# Altium PCB PCB3__Right Leg.PcbDoc
Units mm, origin at the board's own origin, x right, y up, seen from the top; angles counter-clockwise.
Board outline 30 x 20 mm, 2 copper layers (Top Layer, Bottom Layer); 24 components, 16 nets, 92 pads, 15 vias.
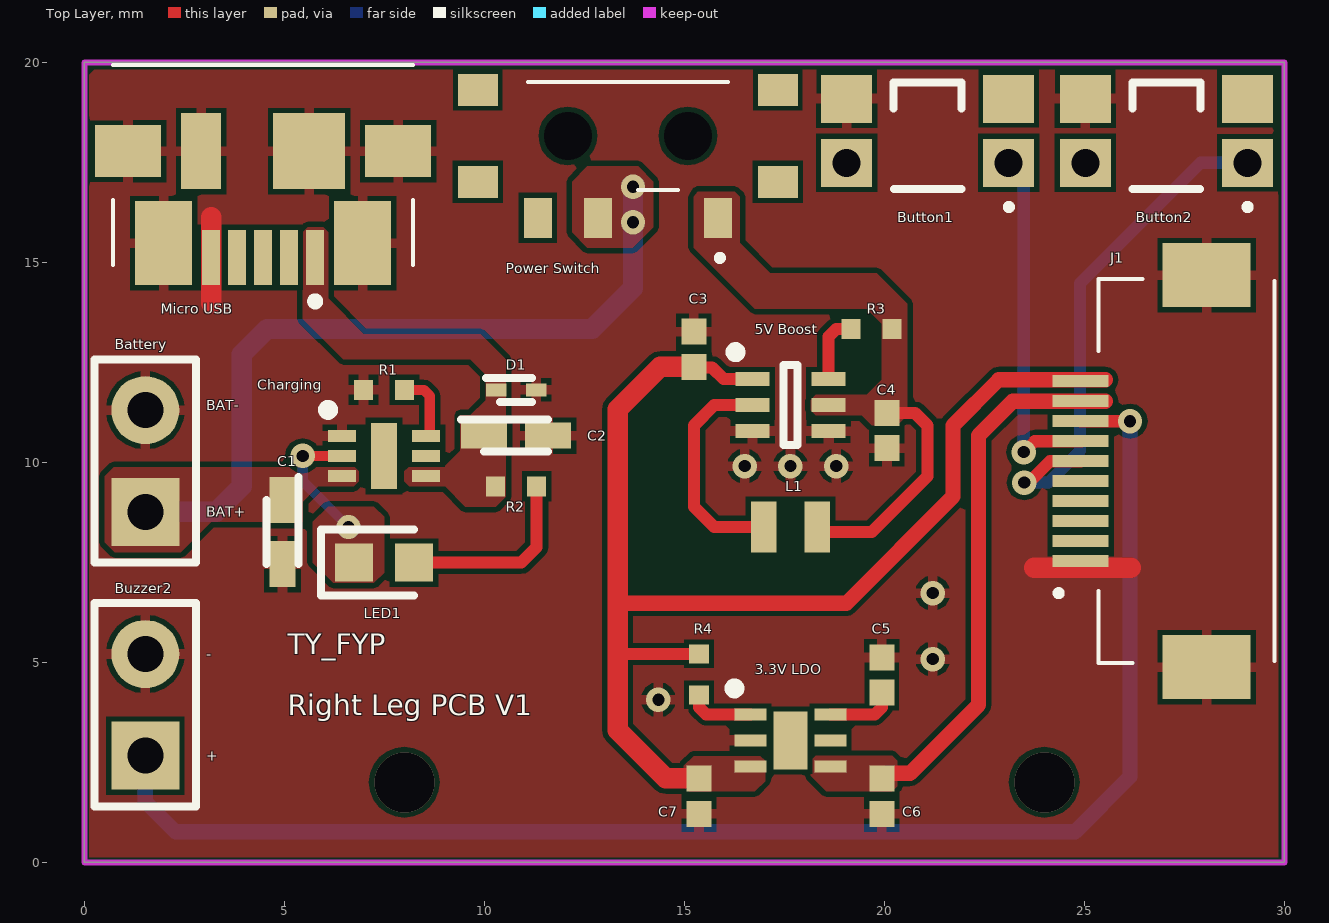
[diagram p0: Top Layer view]
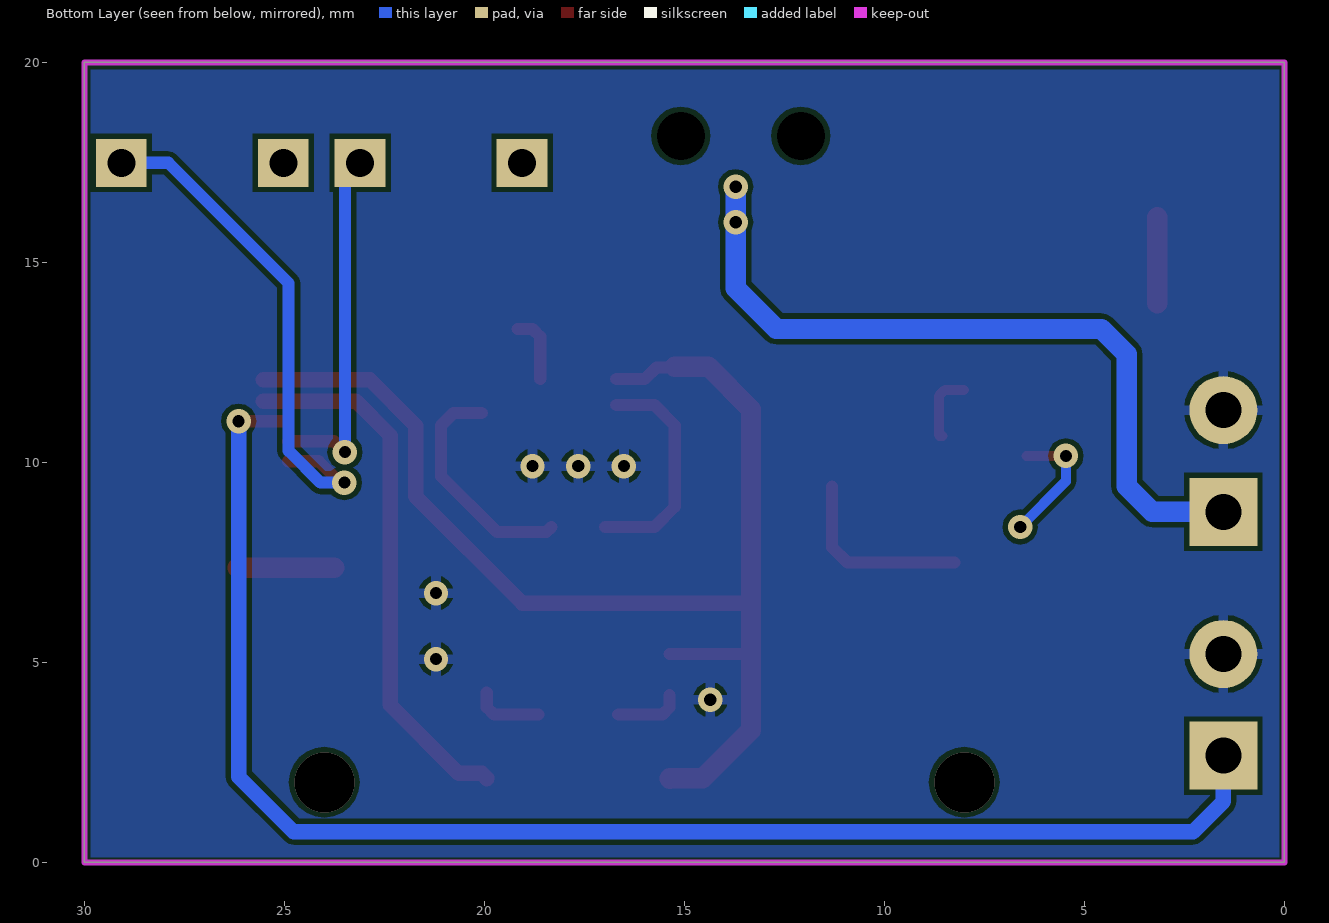
[diagram p1: Bottom Layer view, seen from below]
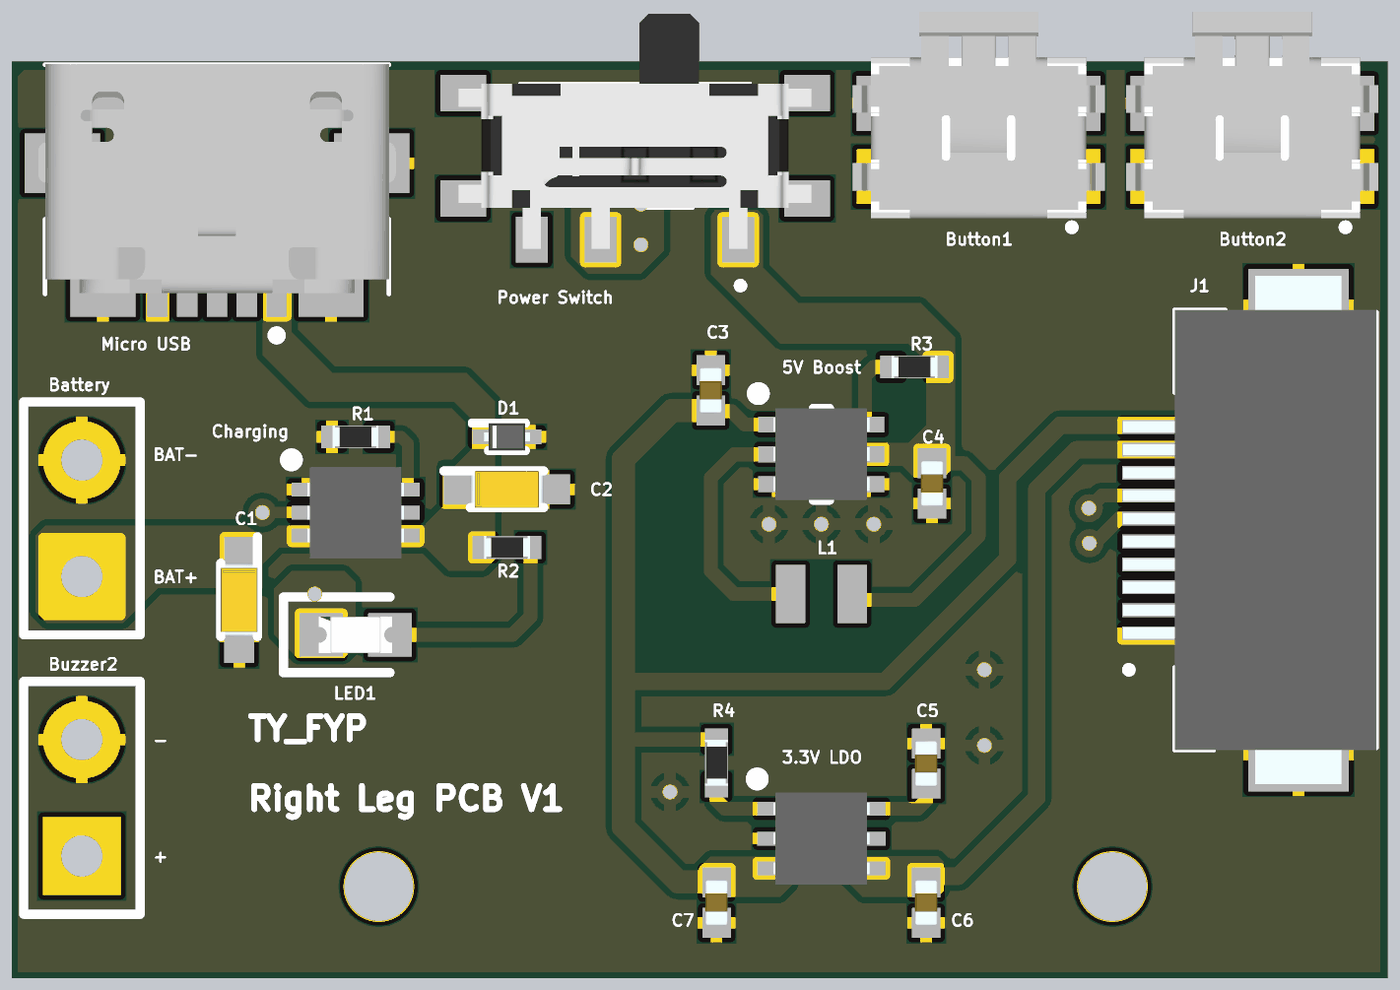
[diagram p2: 3D render of the assembled board from above, using the file's embedded part models]

## Layer stack, top to bottom
Top Solder: solder mask 0.0102, Solder Resist, Dk 3.5
Top Layer: signal copper 0.0356
Dielectric 1: dielectric 0.32, FR-4, Dk 4.8
Bottom Layer: signal copper 0.0356
Bottom Solder: solder mask 0.0102, Solder Resist, Dk 3.5

## Board outline
0,0 0,20 30,20 30,0

## Design rules (kind name [scope] priority, off if disabled: settings)
Clearance [All] p1: gap=0.127 ignorepadtopadclearanceinfootprint=FALSE except(0: Arc-Hole Track-Hole SMDPad-Hole THPad-Hole Via-Hole Fill-Hole Poly-Hole Region-Hole Text-Hole)
PolygonConnect PolygonConnect_1 [InNet('BAT-')] p1: connectstyle=Relief reliefconductorwidth=0.254 reliefentries=4 polygonreliefangle="90 Angle" airgapwidth=0.127
PolygonConnect [All] p2: connectstyle=Direct reliefconductorwidth=0.203 reliefentries=4 polygonreliefangle="90 Angle" airgapwidth=0.127
RoutingVias [All] p1: holewidth=0.305 width=0.61 viastyle="Through Hole" minholewidth=0.305 minwidth=0.61 maxholewidth=0.711 maxwidth=1.27
SolderMaskExpansion [All] p1: expansion=0.102
Width [All] p1: maxlimit=1.524 minlimit=0.127 preferedwidth=0.254
30 further rules are at their usual default settings.

## Components (designator, comment, footprint, x,y, rotation, side; value= is the part's Value field where it differs from the comment)
"3.3V LDO" "3.3V LDO 150mA" SON65P200X200X90-7N-D 17.653,3.048 r0 top (schematic designator IC3)
"5V Boost" "5V Boost 500mA" SON65P200X200X80-6N 17.653,11.43 r0 top (schematic designator IC2)
Battery "Battery" "Buzzer & Battery" 1.524,10.033 r90 top (schematic designator JP1)
Button1 "Push Button" Push_Button 21.082,18.288 r180 top (schematic designator S1)
Button2 "Push Button" Push_Button 27.051,18.288 r180 top (schematic designator S2)
Buzzer2 "Buzzer" "Buzzer & Battery" 1.524,3.937 r90 top (schematic designator LS1)
C1 "0603_Tan_4.7u" CAPPM168X90N 4.953,8.255 r270 top
C2 "0603_Tan_4.7u" CAPPM168X90N 10.795,10.668 r0 top
C3 "0402_10u" CAPC1005X55N 15.24,12.827 r90 top
C4 "0402_10u" CAPC1005X55N 20.066,10.795 r270 top
C5 "0402_100n" 0402_CAP 19.939,4.684 r90 top
C6 "0402_1u" CAPC1005X55N 19.939,1.651 r270 top
C7 "0402_1u" CAPC1005X55N 15.367,1.651 r270 top
Charging "Battery Charging IC" SON50P200X200X80-7N-D 7.493,10.16 r0 top (schematic designator IC1)
D1 "TVS 5V" SODFL1006X40N 10.795,11.811 r0 top
J1 "FFC Connector" 528921033 27.559,9.779 r90 top
L1 "0603_L 2.2u" Inductor 17.653,8.382 r180 top
LED1 "0603_Red_LED" LEDC1608X80N 7.493,7.493 r0 top
"Micro USB" "MicroUSB" 473461001 4.471,17.024 r180 top (schematic designator J2)
"Power Switch" "Slide Switch" 450404015514 13.589,18.161 r0 top (schematic designator S3)
R1 "0402_1.5k" 0402_R 7.493,11.811 r180 top
R2 "0402_1k" 0402_R 10.795,9.398 r180 top
R3 "0402_10M" 0402_R 19.685,13.335 r0 top
R4 "0402_10M" 0402_R 15.367,4.699 r90 top

## Footprints (in the part's own frame and the unit in brackets; to place one, negate y for a bottom-side part, rotate by r counter-clockwise, add the part's x,y. Pads: shape width x height; smd on the part's side, far side on the other; paste and mask are expansions set on the pad)
0402_CAP [mm]
  rect 0.65x0.62 smd: 1(-0.44,0) 2(0.44,0)
  body extent -0.5,-0.25 0.5,0.25, height 0.55
0402_R [mm]
  rect 0.475x0.5 smd: 1(-0.513,0) 2(0.513,0)
  body extent -0.5,-0.25 0.5,0.25, height 0.35
473461001 [mm]
  rect 0.45x1.38 smd: 1(-1.3,1.903) 2(-0.65,1.903) 3(0,1.903) 4(0.65,1.903) 5(1.3,1.903)
  rect 1.425x2.1 smd: 6(2.487,1.544) 7(-2.487,1.544)
  rect 1.8x1.9 smd: 8(-1.15,-0.756)
  rect 1x1.9 smd: 9(1.55,-0.756)
  rect 1.65x1.3 smd: 10(-3.375,-0.756) 11(3.375,-0.756)
  silkscreen extent -3.75,-2.91 3.75,3.1, body extent -3.9,-2.92 3.9,2.08, height 2.66
528921033 [mm]
  rect 0.3x1.4 smd: 1(-2.25,2.65) 2(-1.75,2.65) 3(-1.25,2.65) 4(-0.75,2.65) 5(-0.25,2.65) 6(0.25,2.65) 7(0.75,2.65) 8(1.25,2.65) 9(1.75,2.65) 10(2.25,2.65)
  rect 1.6x2.2 smd: MP1(-4.9,-0.5) MP2(4.9,-0.5)
  silkscreen extent -4.8,-2.2 4.8,3.25, body extent -5.54,-2.2 5.54,3.32, height 2.1
450404015514 [mm]
  rect 0.7x1 smd: 1(2.25,-2.05) 2(-0.75,-2.05) 3(-2.25,-2.05)
  round 0.6 hole 1.2 unplated: MH1(1.5,0) MH2(-1.5,0)
  rect 1x0.8 smd: MP1(3.75,-1.15) MP2(-3.75,-1.15) MP3(-3.75,1.15) MP4(3.75,1.15)
  silkscreen extent -2.5,-3.1 2.5,1.35, body extent -3.85,-2.25 3.85,2.88, height 1.4
"Buzzer & Battery" [mm]
  rect 1.7x1.7 hole 0.9: 1(-1.27,0)
  round 1.7 hole 0.9: 2(1.27,0)
  silkscreen extent -2.54,-1.27 2.54,1.27
CAPC1005X55N [mm]
  rect 0.65x0.62 smd: 1(-0.44,0) 2(0.44,0)
  body extent -0.5,-0.25 0.5,0.25, height 0.55
CAPPM168X90N [mm]
  rect 1.15x0.65 smd: 1(-0.8,0) 2(0.8,0)
  silkscreen extent -1.38,-0.4 0.8,0.4, body extent -0.8,-0.4 0.8,0.4, height 0.9
Inductor [mm]
  rect 0.64x1.27 smd: 1(-0.67,0) 2(0.67,0)
LEDC1608X80N [mm]
  rect 0.95x0.95 smd: 1(-0.75,0) 2(0.75,0)
  silkscreen extent -1.58,-0.82 0.75,0.82, body extent -0.8,-0.4 0.8,0.4, height 0.7
Push_Button [mm]
  rect 1.27x1.2 hole 0.7: 1(-2.025,0.8) 4(2.025,0.8)
  rect 1.27x1.2 smd: 2(-2.025,-0.8) 3(2.025,-0.8)
  silkscreen extent -2.08,-1.21 0.85,1.96, body extent -2.75,-2.79 2.75,1.71, height 1.65
SODFL1006X40N [mm]
  rect 0.51x0.32 smd: 1(-0.5,0) 2(0.5,0)
  silkscreen extent -0.75,-0.3 0.4,0.3, body extent -0.5,-0.3 0.5,0.3, height 0.4
SON50P200X200X80-7N-D [mm]
  rect 0.7x0.3 smd: 1(-1.05,0.5) 2(-1.05,0) 3(-1.05,-0.5) 4(1.05,-0.5) 5(1.05,0) 6(1.05,0.5)
  rect 0.65x1.65 smd: 7(0,0)
  silkscreen extent -1.52,1.03 -1.27,1.27, body extent -1.05,-1 1.05,1, height 0.8
SON65P200X200X80-6N [mm]
  rect 0.85x0.35 smd: 1(-0.95,0.65) 2(-0.95,0) 3(-0.95,-0.65) 4(0.95,-0.65) 5(0.95,0) 6(0.95,0.65)
  silkscreen extent -1.5,-1 0.18,1.45, body extent -1.05,-1 1.05,1, height 0.8
SON65P200X200X90-7N-D [mm]
  rect 0.8x0.3 smd: 1(-1,0.65) 2(-1,0) 3(-1,-0.65) 4(1,-0.65) 5(1,0) 6(1,0.65)
  rect 0.85x1.45 smd: 7(0,0)
  silkscreen extent -1.52,1.18 -1.27,1.42, body extent -1.05,-1 1.05,1, height 0.9

## Part data
"3.3V LDO": "Integrated Circuit", Manufacturer_Name=Microchip, Manufacturer_Part_Number=MIC47050-1.8YML-TR, Datasheet Link=https://componentsearchengine.com/Datasheets/1/MIC47050-1.8YML-TR.pdf, Height=0.9mm
"5V Boost": "Integrated Circuit", Manufacturer_Name="Maxim Integrated", Manufacturer_Part_Number=MAX17223ELT+T, Datasheet Link=https://datasheets.maximintegrated.com/en/ds/MAX17220-MAX17225.pdf, Height=0.8mm
Battery: "HDR-1X2"
Button1 Button2: "Switch", Manufacturer_Name=Panasonic, Manufacturer_Part_Number=EVQ-9P701P, Mouser2 Part Number=667-EVQ-9P701P, Datasheet Link=https://componentsearchengine.com//EVQ-9P701P.pdf, Mouser2 Price/Stock=https://www.mouser.com/Search/Refine.aspx?Keyword=667-EVQ-9P701P
Buzzer2: "Loudspeaker or Buzzer", Manufacturer_Name="CUI Inc.", Manufacturer_Part_Number=CPT-12123-81-SMT-TR, Datasheet Link=https://www.cuidevices.com/product/resource/cpt-12123-81-smt-tr.pdf, Height=3.3mm
C1 C2: "Capacitor Polarised", Manufacturer_Name=Vishay, Manufacturer_Part_Number=TMCJ0J475MTRF, Datasheet Link=https://componentsearchengine.com/Datasheets/1/TMCJ0J475MTRF.pdf, Height=0.9mm
C3 C4 C6 C7: library part 0402_C, "Capacitor", Manufacturer_Name=Kemet, Manufacturer_Part_Number=C0402C474K8RACTU, Datasheet Link=https://content.kemet.com/datasheets/KEM_C1002_X7R_SMD.pdf, Height=0.55mm
C5: library part 0603_C, "Capacitor", Manufacturer_Name=Vishay, Manufacturer_Part_Number=VJ0603HIFRQ1KIT, Datasheet Link=http://www.vishay.com/docs/45226/vj31xrohsautomlcc.pdf, Height=0.97mm
Charging: "Integrated Circuit", Manufacturer_Name=Microchip, Manufacturer_Part_Number=MCP73830LT-0AAI/MYY, Mouser2 Part Number=579-MCP73830LT0AAIMY, Datasheet Link=https://componentsearchengine.com//MCP73830LT-0AAI_MYY.pdf, Height=0.8mm, Mouser2 Price/Stock=https://www.mouser.com/Search/Refine.aspx?Keyword=579-MCP73830LT0AAIMY
D1: "TVS Diode (Uni-directional)", Manufacturer_Name="ON Semiconductor", Manufacturer_Part_Number=SZESD9101P2T5G, Mouser2 Part Number=863-SZESD9101P2T5G, Datasheet Link=https://componentsearchengine.com//SZESD9101P2T5G.pdf, Height=0.4mm, Mouser2 Price/Stock=https://www.mouser.com/Search/Refine.aspx?Keyword=863-SZESD9101P2T5G
J1: "Connector", Manufacturer_Name=Molex, Manufacturer_Part_Number=52892-1033, Datasheet Link=https://componentsearchengine.com/Datasheets/2/52892-1033.pdf, Height=2mm
L1: "Inductor", Manufacturer_Name=Pulse, Manufacturer_Part_Number=PE-0603CLH2R2STS, Datasheet Link=https://www.mouser.de/datasheet/2/336/PLEI_S_A0011079421_1-2514267.pdf, Height=1mm
LED1: "LED", Manufacturer_Name="Wurth Elektronik", Manufacturer_Part_Number=150060RS75000, Datasheet Link=http://katalog.we-online.de/led/datasheet/150060RS75000.pdf, Height=0.8mm
"Micro USB": "Connector", Manufacturer_Name=Molex, Manufacturer_Part_Number=47346-1001, Datasheet Link=http://www.molex.com/webdocs/datasheets/pdf/en-us/0473461001_IO_CONNECTORS.pdf, Height=2.94mm
"Power Switch": "Switch", Manufacturer_Name="Wurth Elektronik", Manufacturer_Part_Number=450404015514, Datasheet Link=https://katalog.we-online.de/em/datasheet/450404015514.pdf, Height=1.4mm
R1 R2 R3 R4: library part 0402_R, "Resistor", Manufacturer_Name=Panasonic, Manufacturer_Part_Number=ERA-2ARB472X, Datasheet Link=http://industrial.panasonic.com/cdbs/www-data/pdf/RDM0000/AOA0000C307.pdf, Height=0.4mm

## Via types
v1: diameter 0.61, hole 0.305, Top Layer to Bottom Layer, tented both sides, 13 vias
v2: diameter 1.5, hole 1.5, Top Layer to Bottom Layer, 2 vias

## Nets (pads, with @x,y where several pads share a name; then routed paths per layer and width w, separated by ;. In a path a pad name is that pad's centre, name@x,y a point inside that pad or via, vN(x,y) a via of type N, cw(c..) or ccw(c..) an arc to the next point about the centre after c; other vN are vias at no path point)
3.3V: "3.3V LDO.4" C6.1 J1.9 | length 13.4
  Top Layer w0.381: C6.1 19.939,2.106 20.058,2.225 20.64,2.225 22.352,3.937 22.352,10.668 23.213,11.529 J1.9 J1.9@25.527,11.529
5V: "3.3V LDO.3" "5V Boost.1" C3.1 C7.1 J1.10 R4.2 | length 32.1
  Top Layer w0.305: 13.335,5.207 15.362,5.207 R4.2 ; C3.1 15.24,12.372 15.695,12.372 15.987,12.08 16.703,12.08
  Top Layer w0.381: 13.335,6.477 19.05,6.477 21.717,9.144 21.717,10.922 22.86,12.065 J1.10@25.527,12.065
  Top Layer w0.508: C3.1 14.395,12.387 13.335,11.327 13.335,6.477 13.335,5.207 13.335,3.302 14.534,2.103 15.367,2.103 C7.1
BAT+: "Power Switch.2" Battery.1 C1.1 Charging.3 | length 19
  Bottom Layer w0.508: Battery.1 3.302,8.763 3.937,9.398 3.937,12.7 4.572,13.335 12.7,13.335 13.716,14.351 v1(13.716,16.002) v1(13.716,16.891)
BAT-: "3.3V LDO.2" "5V Boost.3" "5V Boost.4" "Micro USB.5" "Micro USB.6" "Micro USB.7" "Micro USB.8" "Micro USB.9" "Micro USB.10" "Micro USB.11" Battery.2 Button1.3 Button2.3 Buzzer2.2 C1.2 C2.2 C3.2 C4.2 C5.2 C6.2 C7.2 Charging.1 D1.2 J1.1 J1.MP1 J1.MP2 R1.2 | length 4.6
  Top Layer w0.508: 3.175,13.97 3.175,16.129 ; 23.749,7.366 26.162,7.366
  other v1: 14.351,4.064 21.209,5.08 21.209,6.731 16.51,9.906 17.653,9.906 18.796,9.906
Button1: Button1.1 J1.7 | length 8.9
  Top Layer w0.305: v1(23.486,10.254) 23.761,10.529 J1.7
  Bottom Layer w0.305: Button1.1 23.486,17.109 v1(23.486,10.254)
Button2: Button2.1 J1.6 | length 13
  Top Layer w0.305: v1(23.499,9.492) 23.604,9.492 24.141,10.029 J1.6
  Bottom Layer w0.305: v1(23.499,9.492) 24.097,9.492 24.892,10.287 24.892,14.478 27.902,17.488 Button2.1
Buzzer2: Buzzer2.1 J1.8 | length 36.8
  Top Layer w0.305: J1.8 v1(26.142,11.029)
  Bottom Layer w0.381: Buzzer2.1 1.524,1.524 2.286,0.762 24.765,0.762 26.142,2.139 v1(26.142,11.029)
LX: "5V Boost.2" L1.2 | length 5.7
  Top Layer w0.305: 16.703,11.43 15.748,11.43 15.24,10.922 15.24,8.89 15.748,8.382 L1.2
NetC2_1: "Micro USB.1" C2.1 Charging.4 D1.1 R2.2
NetC4_1: "5V Boost.5" "Power Switch.1" C4.1 L1.1 R3.2 | length 5.8
  Top Layer w0.305: L1.1 18.45,8.255 19.685,8.255 21.082,9.652 21.082,10.922 20.769,11.235 C4.1
NetC5_1: "3.3V LDO.6" C5.1 | length 1.7
  Top Layer w0.305: 18.653,3.698 19.76,3.698 19.939,3.877 C5.1
NetIC1_6: Charging.6 R1.1 | length 1.8
  Top Layer w0.254: R1.1 8.487,11.811 8.636,11.662 8.636,10.683 8.613,10.66 Charging.6
NetIC2_6: "5V Boost.6" R3.1 | length 1.7
  Top Layer w0.305: 18.603,12.08 18.603,13.142 18.796,13.335 R3.1
NetIC3_1: "3.3V LDO.1" R4.1 | length 1.7
  Top Layer w0.305: R4.1 15.367,3.877 15.546,3.698 16.653,3.698
NetLED1_2: LED1.2 R2.1 | length 4.7
  Top Layer w0.305: LED1.2 10.922,7.493 11.308,7.879 R2.1
STAT: Charging.2 LED1.1 | length 3.2
  Top Layer w0.254: v1(5.461,10.16) Charging.2
  Bottom Layer w0.254: v1(5.461,10.16) 5.461,9.525 v1(6.604,8.382)
pads on no net: "3.3V LDO.5" "3.3V LDO.7" "Micro USB.2" "Micro USB.3" "Micro USB.4" "Power Switch.3" "Power Switch.MH1" "Power Switch.MH2" "Power Switch.MP1" "Power Switch.MP2" "Power Switch.MP3" "Power Switch.MP4" Button1.2 Button1.4 Button2.2 Button2.4 Charging.5 Charging.7 J1.2 J1.3 J1.4 J1.5
copper on no net:
  other v2: 8,2 24,2

## Polygon pours and split planes (outlines as drawn)
BAT- on Top Layer "Top Layer-BAT-" (solid, remove dead copper, pour order 22): 0.254,19.812 29.845,19.812 29.845,0.127 0.127,0.127 0.127,19.685
no net on Top Layer "Top Layer-No Net" (solid, pour order 20): 0.254,19.812
3.3V on Top Layer "Top Layer-3.3V" (solid, pour order 18): 18.288,2.667 18.161,2.54 18.161,2.159 18.542,1.778 20.193,1.778 20.32,1.905 20.32,2.54 20.193,2.667
5V on Top Layer "Top Layer-5V" (solid, pour order 16): 15.113,1.778 16.764,1.778 17.018,2.032 17.018,2.54 16.891,2.667 15.24,2.667 14.986,2.413 14.986,1.905
BAT- on Top Layer "Top Layer-BAT- 1" (solid, pour order 14): 17.018,2.794 17.145,2.921 17.145,3.175 17.018,3.302 14.732,3.302 14.605,3.175 14.605,2.921 14.732,2.794
BAT- on Top Layer "Top Layer-BAT- 2" (solid, pour order 12): 16.129,11.049 18.923,11.049 19.304,10.668 19.304,9.779 18.796,9.271 16.51,9.271 15.875,9.906 15.875,10.795
NetC4_1 on Top Layer "Top Layer-NetC4_1" (solid, pour order 10): 15.24,16.637 15.335,16.764 16.256,16.764 16.383,16.637 16.383,15.494 17.145,14.732 19.812,14.732 20.574,13.97 20.574,11.176 20.32,10.922 19.685,10.922 19.431,11.176 18.288,11.176 18.161,11.303 18.161,11.557 18.288,11.684 19.558,11.684 19.939,12.065 19.939,13.462 19.558,13.843 16.764,13.843 15.24,15.367
BAT+ on Top Layer "Top Layer-BAT+" (solid, pour order 6): 12.7,15.367 12.573,15.367 13.716,15.367 14.224,15.875 14.224,17.018 13.843,17.399 12.573,17.399 12.192,17.018 12.192,15.748 12.573,15.367 13.208,15.367
STAT on Top Layer "Top Layer-STAT" (solid, pour order 4): 6.223,6.985 7.239,6.985 7.493,7.239 7.493,8.636 7.239,8.89 6.096,8.89 5.715,8.509 5.715,7.493
BAT+ on Top Layer "Top Layer-BAT+ 1" (solid, pour order 2): 6.731,9.398 6.858,9.525 6.858,9.779 6.756,9.881 0.737,9.881 0.508,9.652 0.508,8.001 0.762,7.747 2.413,7.747 3.175,8.509 5.461,8.509 5.461,9.017 5.842,9.398
NetC2_1 on Top Layer "Top Layer-NetC2_1" (solid, pour order 0): 5.588,15.875 5.969,15.875 6.096,15.748 6.096,14.097 6.985,13.208 9.906,13.208 10.541,12.573 10.541,9.144 10.287,8.89 9.525,8.89 9.017,9.398 8.128,9.398 8.001,9.525 8.001,9.779 8.128,9.906 9.017,9.906 9.398,10.287 9.398,11.176 9.652,11.176 10.033,11.557 10.033,12.192 9.652,12.573 6.477,12.573 5.461,13.589 5.461,15.748
BAT- on Bottom Layer "Bottom Layer-BAT-" (solid, pour order 24): 29.845,19.812 29.845,0.127 0.127,0.127 0.127,19.812

## Keep-outs
Keep-Out Layer:
  the board outline again, w0.152

## Other copper
Top Layer:
  pour cut-out: 17.876,9.144 17.43,9.144 17.43,7.62 17.876,7.62

## Silkscreen, mask and mechanical layers (free items; w line width, h text height)
Top Overlay:
  text "BAT-" at 3.048,11.303 h0.25
  text "BAT+" at 3.048,8.636 h0.25
  text "TY_FYP" at 5.08,5.207 h0.51
  text "-" at 3.048,5.08 h0.25
  text "Right Leg PCB V1" at 5.08,3.683 h0.51
  text "+" at 3.048,2.54 h0.25
Mechanical 1:
  the board outline again, w0.152

## Dimensions
0,20 to 0,0 on Mechanical 13
0,0 to 30,0 on Mechanical 13